# Altium PCB Input_Accessory.PcbDoc (part 2 of 2)
Units mm, origin at the board's own origin, x right, y up, seen from the top; angles counter-clockwise.
Board outline 40.6 x 51.6 mm, 2 copper layers (L1_Top, L14_Bot), stack 1.671 mm thick; 44 components, 25 nets, 98 pads, 61 vias.
Unrouted connection lines stored in the file: 61.
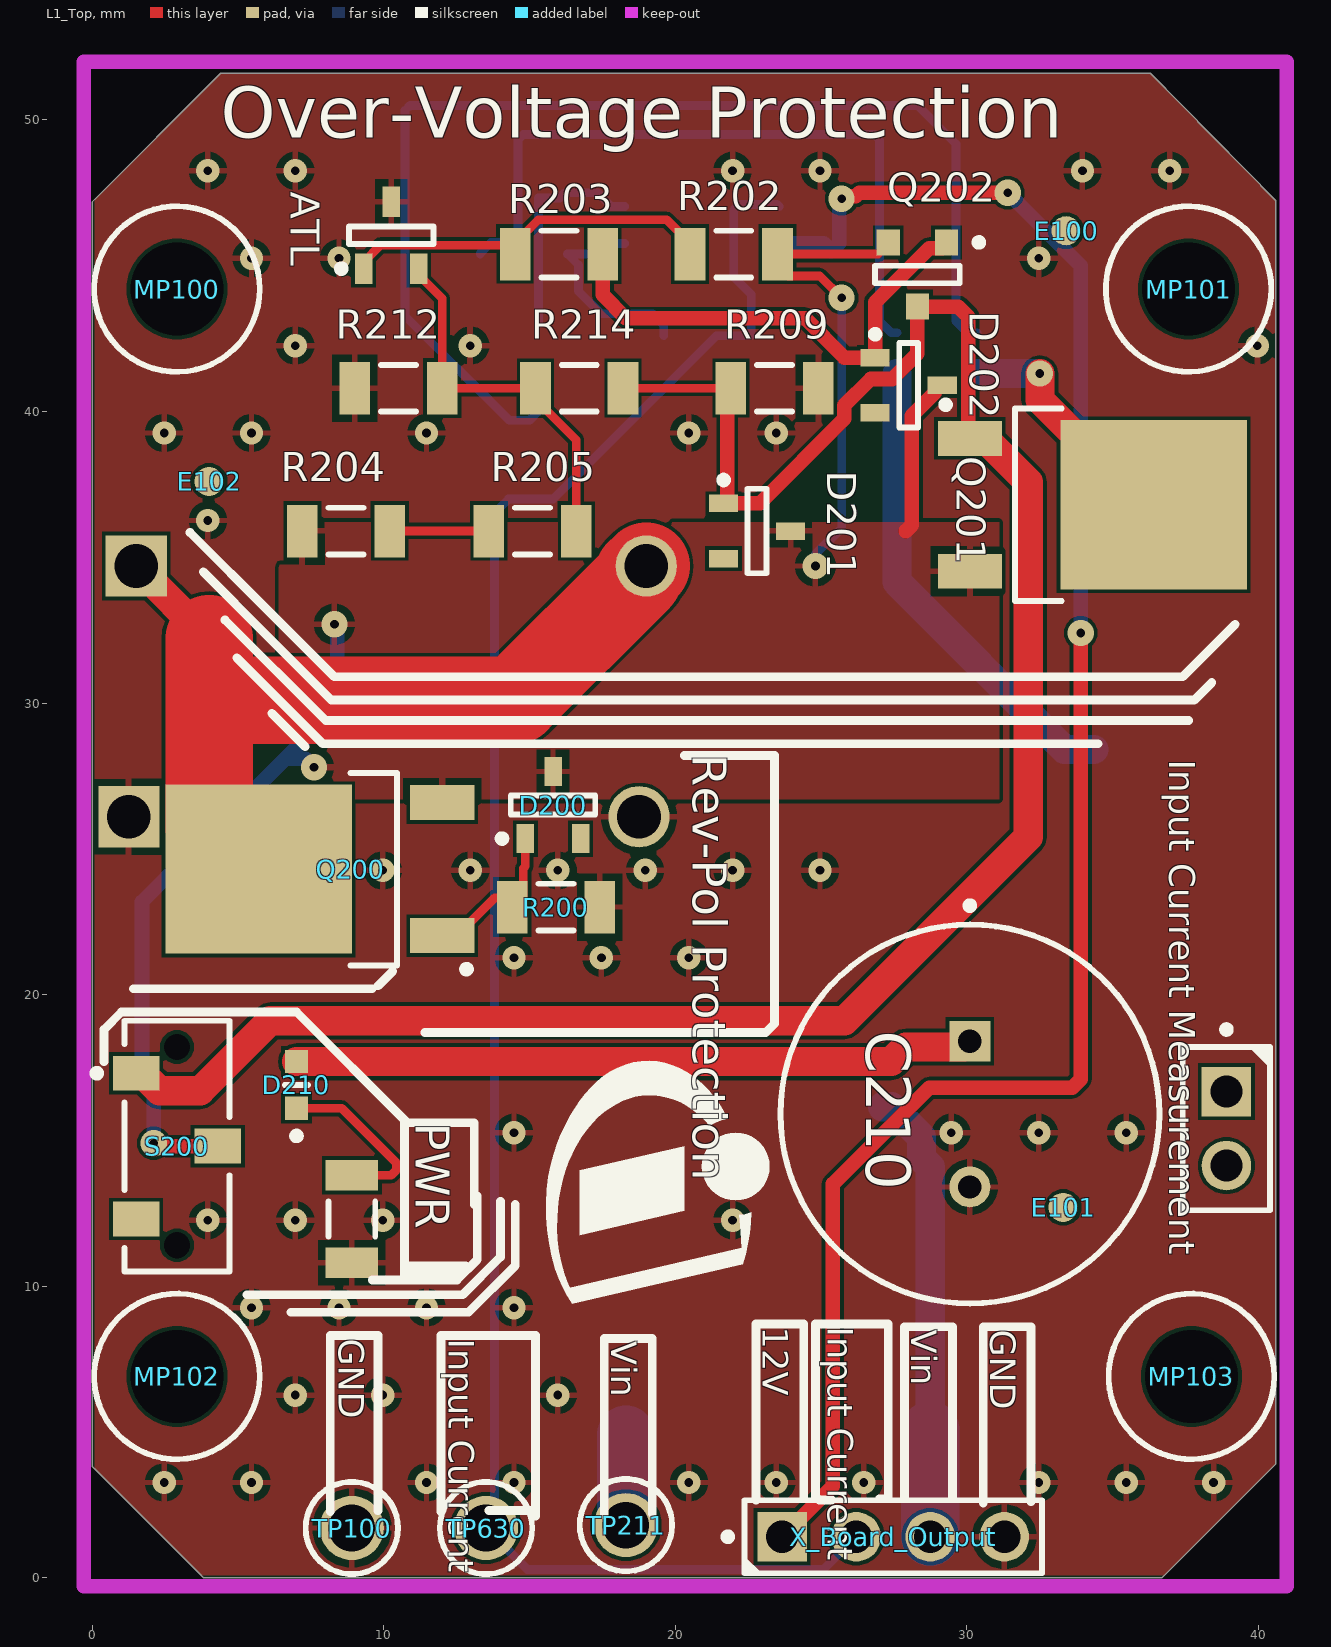
[diagram p0: L1_Top view]

## Part data (continued)
TP211 TP630: library part 382400, "PC Test Point-Multipurpose THT, Red", Legacy PartNumber=CON01500529, Manufacturer="Keystone Electronics Corp.", Package Description="Test Point, 1.78 mm Lead Width, Round, 3.17 mm Dia X 8.28 mm H body", Supplier Part Number 1=2301288, Temperature max=0, Temperature Range=Military, Voltage DC (max)=na, Alternate View=Yes, Application=Test, Article Number=382400, Automotive Qualified=No, Combined Parameters="Board-to-Cable None (onboard);1x1;Mounting:THT;Orient:0° (vertical);Shielded:No", ComponentLink1Description="Vendor WebSite", ComponentLink1URL=http://www.keyelco.com/, ComponentLink2Description=Datasheet, ComponentLink2URL=http://webnetprod.muc.infineon.com/PCBPortal_Prod/WorkFlows/AltiumComponent/StandardDocumentation?Versionid=382401, ComponentStatus=Released, Legacy DeviceID=KEY_5010, Manufacturer Order Number=5010, Multiple Parts=No, Part Type=Connector, PLMStatus=Active, QuickPick="0° (vertical) / Board-to-Cable", RoHS Compliant=Y, Second Source allowed=Yes, Style="Not Applicable", Supplier 1=Farnell, Supplier 2=DigiKey, Supplier 3=Mouser, Supplier Part Number 2=36-5010-ND, Supplier Part Number 3=534-5010, Symbol type="Connector, 1 Lead, Female", Temperature min=0, Type=Board-to-Cable, Version Number=V01
X_Board_Output: library part 378073, "Through hole .025 SQ Post Header, 2.54mm pitch, 4 pin, vertical, single row", Legacy PartNumber=CON01500102, Manufacturer=Samtec, Package Description="Header,vertical,2.54mm pitch;0.64mm lead width,4 pins,1 row,4 pins per row,10.225mm L X 2.54mm W X 8.38mm H body", Supplier Part Number 1=2035607, Temperature max=125, Temperature min=-55, Temperature Range=Military, Voltage DC (max)=na, Article Number=378073, Automotive Qualified=No, Combined Parameters="Board-to-Board Header (male);4x1;Mounting:THT;Orient:0° (vertical);Shielded:No", ComponentLink1Description="Vendor WebSite", ComponentLink1URL=http://www.samtec.com/, ComponentLink2Description=Datasheet, ComponentLink2URL=http://webnetprod.muc.infineon.com/PCBPortal_Prod/WorkFlows/AltiumComponent/StandardDocumentation?Versionid=378074, ComponentStatus=Released, Legacy DeviceID=SAM_TSW-104-07-L-S, Manufacturer Order Number=TSW-104-07-L-S, Part Type=Connector, PLMStatus=Active, QuickPick="0° (vertical) / Board-to-Board", RoHS Compliant=Y, Second Source allowed=Yes, Style=Strip, Supplier 1=Farnell, Supplier 2=DigiKey, Supplier 3=Mouser, Supplier Part Number 2=SAM1031-04-ND, Type=Board-to-Board, Version Number=V01

## Via types
v1: diameter 0.8, hole 0.3, L1_Top to L14_Bot, tented both sides, 52 vias
v2: diameter 0.9, hole 0.3, L1_Top to L14_Bot, tented both sides, 9 vias

## Nets (pads, with @x,y where several pads share a name; then routed paths per layer and width w, separated by ;. In a path a pad name is that pad's centre, name@x,y a point inside that pad or via, vN(x,y) a via of type N, cw(c..) or ccw(c..) an arc to the next point about the centre after c; other vN are vias at no path point)
12V: "Currentsense Amp.7" C630.2 X_Board_Output.1 | length 63.9
  L1_Top w0.5: X_Board_Output.1 25.4,3.14 25.4,13.5 28.7,16.8 33.607,16.8 33.9,17.093 v2(33.9,32.4) ; v2(25.7,47.3) 25.777,47.377 26.177,47.377 26.3,47.5 v2(31.4,47.5)
  L14_Bot w0.5: 23.55,45.765 25.085,45.765 C630.2 25.623,45.773 25.623,47.223 v2(25.7,47.3) ; v2(31.4,47.5) 33.9,45 v2(33.9,32.4)
Curr_In+: R631.1 Shunt.4 | length 39.7
  L14_Bot w0.3: R631.1 15,39.7 14.3,39.7 10.724,43.276 10.724,50.324 10.9,50.5 28.3,50.5 29.625,49.175 29.625,43.1 30.025,42.7 Shunt.4
Curr_In-: R633.1 Shunt.3 | length 24.4
  L14_Bot w0.3: R633.1 13.3,45.425 13.675,45.8 14.424,45.8 14.6,45.976 14.6,49.324 14.776,49.5 26.824,49.5 27,49.324 27,43.1 27.4,42.7 Shunt.3
GND: "Currentsense Amp.4" ATL.3 C210.2 C212.2 C213.1 C220.2 C630.1 D211.2 GND.1 GND.2 PWR.2 R200.1 R209.1 R212.2 R632.2 TP100.1 X_Board_Output.4
  other v1: 2.46,3.26 5.46,3.26 11.46,3.26 14.46,3.26 20.46,3.26 23.46,3.26 26.46,3.26 32.46,3.26 35.46,3.26 38.46,3.26 6.96,6.26 9.96,6.26 15.96,6.26 5.46,9.26 8.46,9.26 11.46,9.26 14.46,9.26 3.96,12.26 6.96,12.26 9.96,12.26 21.96,12.26 14.46,15.26 29.46,15.26 32.46,15.26 35.46,15.26 14.46,21.26 17.46,21.26 20.46,21.26 9.96,24.26 12.96,24.26 15.96,24.26 18.96,24.26 21.96,24.26 24.96,24.26 3.96,36.26 2.46,39.26 5.46,39.26 11.46,39.26 20.46,39.26 23.46,39.26 6.96,42.26 12.96,42.26 39.96,42.26 5.46,45.26 8.46,45.26 32.46,45.26 3.96,48.26 6.96,48.26 21.96,48.26 24.96,48.26 33.96,48.26 36.96,48.26
Input_Current: "Currentsense Amp.6" R634.2 TP630.1 X_Board_Output.2 | length 66.2
  L14_Bot w0.3: 23.55,47.035 23.485,47.1 22.176,47.1 22,46.924 22,44.613 22.6,44.013 R634.2 21.407,42.6 15.807,37 14.276,37 13.79,36.514 13.79,1.99 TP630.1 14.92,0.28 25.08,0.28 X_Board_Output.2
INV_TLV197: "Currentsense Amp.2" R633.2 R634.1 | length 7.3
  L14_Bot w0.3: 18.25,45.765 17.8,45.765 17.435,45.4 R633.2 16.675,45.025 16.675,44.125 17.45,43.35 19.225,43.35 19.6,42.975 R634.1
NetC210_1: "Input Current Measurement.1" C210.1 D210.2 Q201.2 Shunt.2 | length 31.8
  L1_Top w1: D210.2 27.4,17.7 27.9,18.2 29.9,18.2 C210.1 ; v2(32.5,41.3) 32.5,40.4 36.1,36.8 Q201.2
  L14_Bot w1: Shunt.2 v2(32.5,41.3)
NetD200_2: D200.2
NetD201_2: D201.2
NetD202_2: D202.2
NetD210_1: D210.1 PWR.1 | length 6
  L1_Top w0.3: D210.1 8.55,16.1 10.426,14.224 10.426,13.976 10.25,13.8 PWR.1
NetR204_2: R204.2 R205.2 | length 3.4
  L1_Top w0.3: R204.2 R205.2
NetS200_3: S200.3
NetU630_1: "Currentsense Amp.1"
NetU630_5: "Currentsense Amp.5"
NetU630_8: "Currentsense Amp.8"
NetX100_1: INPUT_V.1 INPUT_V.2 Q200.2 | length 29.3
  L1_Top w1: INPUT_V.1 4,32.2
  L1_Top w3: 4,32.2 4,30.1 ; Q200.2 5.4,24.3 4,25.7 4,30.1 ; INPUT_V.2 18.745,34.445 18.745,34.329 14.516,30.1 4,30.1
NINV_TLV197: "Currentsense Amp.3" R631.2 R632.1 | length 7.5
  L14_Bot w0.3: R631.2 15.3,47.324 16.024,47.324 R632.1 17.335,47.5 17.8,47.035 18.25,47.035
Ov_Gate: D202.1 Q202.1 R203.1 | length 16.9
  L1_Top w0.5: R203.1 17.5,44 18.3,43.2 24.448,43.2 25.798,41.85 D202.1 26.85,43.75 28.7,45.6 29.15,45.6 29.3,45.75 Q202.1
Pwr_Gate: D201.1 Q201.1 Q202.3 R209.2 R214.2 S200.1 | length 73.7
  L1_Top w0.3: R214.2 R209.2
  L1_Top w0.5: D201.1 D201.1@21.725,36.85 ; R209.2 21.775,40.675 21.775,36.9 D201.1@21.725,36.85 ; Q201.1 30.05,39.13 30.05,43.25 29.7,43.6 Q202.3 28.3,41.977 27.438,41.115 26.692,41.115 25.795,40.218 25.795,39.745 22.9,36.85 D201.1@21.725,36.85
  L1_Top w1: S200.1 1.7,17.3 2.3,16.7 3.7,16.7 6.1,19.1 25.8,19.1 32.1,25.4 32.1,37.58 30.6,39.08 Q201.1
RevPolGate: D200.1 Q200.1 R200.2 | length 5.6
  L1_Top w0.3: Q200.1 12.5,22.02 13.8,23.32 14.08,23.32 R200.2 14.775,23.375 14.775,24.325 14.85,24.4 D200.1
TL431ref: ATL.2 R205.1 R212.1 R214.1 | length 13.1
  L1_Top w0.3: ATL.2 11.2,44.675 12,43.875 R212.1 R214.1 15.2,40.425 16.6,39.025 R205.1
Vin: "Input Current Measurement.2" C212.1 C213.2 C220.1 D211.1 Shunt.1 TP211.1 X_Board_Output.3 | length 35.1
  L14_Bot w0.3: 18.3,4.9 18.4,5
  L14_Bot w1: C213.2 27.4,16.15 28.44,15.11 28.44,14.387 28.74,14.087 28.74,5.06 ; Shunt.1 27.6,34.15 33.35,28.4 C212.1
  L14_Bot w2: TP211.1 18.3,4.9 ; X_Board_Output.3 28.74,5.06
Vin_RevPol: D200.3 D201.3 D202.3 Q200.3 Q201.3 Q202.2 R202.2 R204.1 S200.2 | length 45.9
  L1_Top w0.3: v2(25.7,43.9) 24.95,44.65 23.875,44.65 23.5,45.025 R202.2 26.95,45.4 27.3,45.75 Q202.2
  L1_Top w0.5: v2(2.1,14.9) 2.177,14.823 2.477,14.823 2.5,14.8 S200.2 ; 27.9,35.9 28.1,36.1 28.1,39.85 D202.3@28.9,40.65
  L14_Bot w0.3: v2(24.8,34.7) 24.8,35.1 25.7,36 v2(25.7,43.9)
  L14_Bot w0.5: v2(2.1,14.9) 2.1,16.653 1.7,17.053 1.7,23.176 6.612,28.088 ; v2(7.6,27.8) 7.312,28.088 6.612,28.088 ; v2(8.3,32.7) 8.377,32.623 8.377,32.372 8.4,32.349 8.4,29.876 6.612,28.088
Zener_20V: ATL.1 R202.1 R203.2 | length 13.2
  L1_Top w0.3: ATL.1 9.3,45.125 9.874,45.699 14.201,45.699 R203.2 14.5,45.775 15.299,46.574 19.701,46.574 20.5,45.775 R202.1
pads on no net: E100.1 E101.1 E102.1 MP100. MP101. MP102. MP103. S200.

## Polygon pours and split planes (outlines as drawn)
GND on L1_Top "GND_L01_P005" (solid, remove dead copper, pour order 5): 4.4,51.6 36.3,51.6 40.6,47.231 40.6,3.9 36.7,0 3.8,0 0,3.8 0,47.2
Vin_RevPol on L1_Top "VIN_REVPOL_L01_P000" (solid, remove dead copper, pour order 0): 6.4,26.7 6.4,36.2 31.1,36.2 31.1,26.7
GND on L14_Bot "GND_L02_P006" (solid, remove dead copper, pour order 6): 4.4,51.6 36.3,51.6 40.6,47.231 40.6,3.9 36.7,0 3.8,0 0,3.8 0,47.2
Vin on L14_Bot "VIN_L02_P004" (solid, remove dead copper, pour order 4): 40.4,13.9 40.4,3.9 16.9,3.8 16.9,2.8 16.9,9.1 28.5,9.1 33.473,14.073
NetC210_1 on L14_Bot "NETC210_1_L02_P003" (solid, remove dead copper, pour order 3): 30.1,41.5 40.2,41.5 40.2,17.9 38.9,16.6 38.6,16.9 29.3,16.9 29.3,19.4 37.1,27.6 30.1,34.6
Vin on L14_Bot "VIN_L02_P002" (solid, remove dead copper, pour order 2): 14.2,18.2 17,15.4 27.7,15.4 27.7,19.9 36.4,28.6 30.3,28.6 21,19.3 14.2,19.3

## Keep-outs
Keep-Out Layer:
  lines w0.5: -0.3,-0.3 5.6,-0.3 34.404,-0.3 40.2,-0.3 40.975,-0.3 40.975,52 -0.3,52 -0.3,-0.3

## Silkscreen, mask and mechanical layers (free items; w line width, h text height)
Top Overlay:
  drawing of 82 lines, arcs and shapes, not listed
  text "Over-Voltage Protection" at 4.4,48.8 h3
  text "Rev-Pol Protection" at 20.2,28.235 h2 r270
  text "12V" at 22.703,8.6 h1.5 r270
  text "Input Current" at 24.937,8.6 h1.5 r270
  text "Vin" at 27.803,8.5 h1.5 r270
  text "GND" at 30.503,8.5 h1.5 r270
  text "GND" at 8.16,8.2 h1.5 r270
  text "Input Current" at 11.933,8.2 h1.5 r270
  text "Vin" at 17.503,8.1 h1.5 r270
Bottom Overlay:
  lines w0.3: 23.2,36.7 34.3,36.7 35.4,37.8 35.4,43.2 ; 26.1,35.9 35.6,35.9 36.7,37 36.7,41.7 ; 27.9,34.8 35.5,34.8 36.7,34.8 38.2,36.3 38.2,40.4
  text "INPUT CURRENT MEASUREMENT" at 4.133,49.1 h2

## Text inside footprints (layer, text, board x,y; h text height)
C210: M13 (CMP_Body_OTL_Top) "+" at 29.795,19.608 h0.6 r270; M13 (CMP_Body_OTL_Top) "-" at 29.821,12.547 h0.6 r270
C212: M14 (CMP_Body_OTL_Bot) "-" at 28.449,28.095 h0.6; M14 (CMP_Body_OTL_Bot) "+" at 32.208,28.121 h0.6
D210: M13 (CMP_Body_OTL_Top) "K" at 7.305,16.214 h0.6 r90; M13 (CMP_Body_OTL_Top) "A" at 7.279,17.179 h0.6 r90
D211: M14 (CMP_Body_OTL_Bot) "A" at 18.054,12.06 h0.6 r90; M14 (CMP_Body_OTL_Bot) "K" at 18.054,17.648 h0.6 r90
Shunt: M14 (CMP_Body_OTL_Bot) "V" at 27.68,41.822 h0.4 r180; M14 (CMP_Body_OTL_Bot) "I" at 27.73,42.66 h0.4 r180; M14 (CMP_Body_OTL_Bot) "I" at 30.169,42.635 h0.4 r180; M14 (CMP_Body_OTL_Bot) "V" at 30.093,41.771 h0.4 r180; Bottom Overlay "V" at 32.175,41.3 h0.4 r180; Bottom Overlay "I" at 32.252,42.7 h0.4 r180; Bottom Overlay "I" at 25.571,42.7 h0.4 r180; Bottom Overlay "V" at 25.508,41.3 h0.4 r180